# EAGLE board LUZES_18Fv3 (EAGLE 5.04)
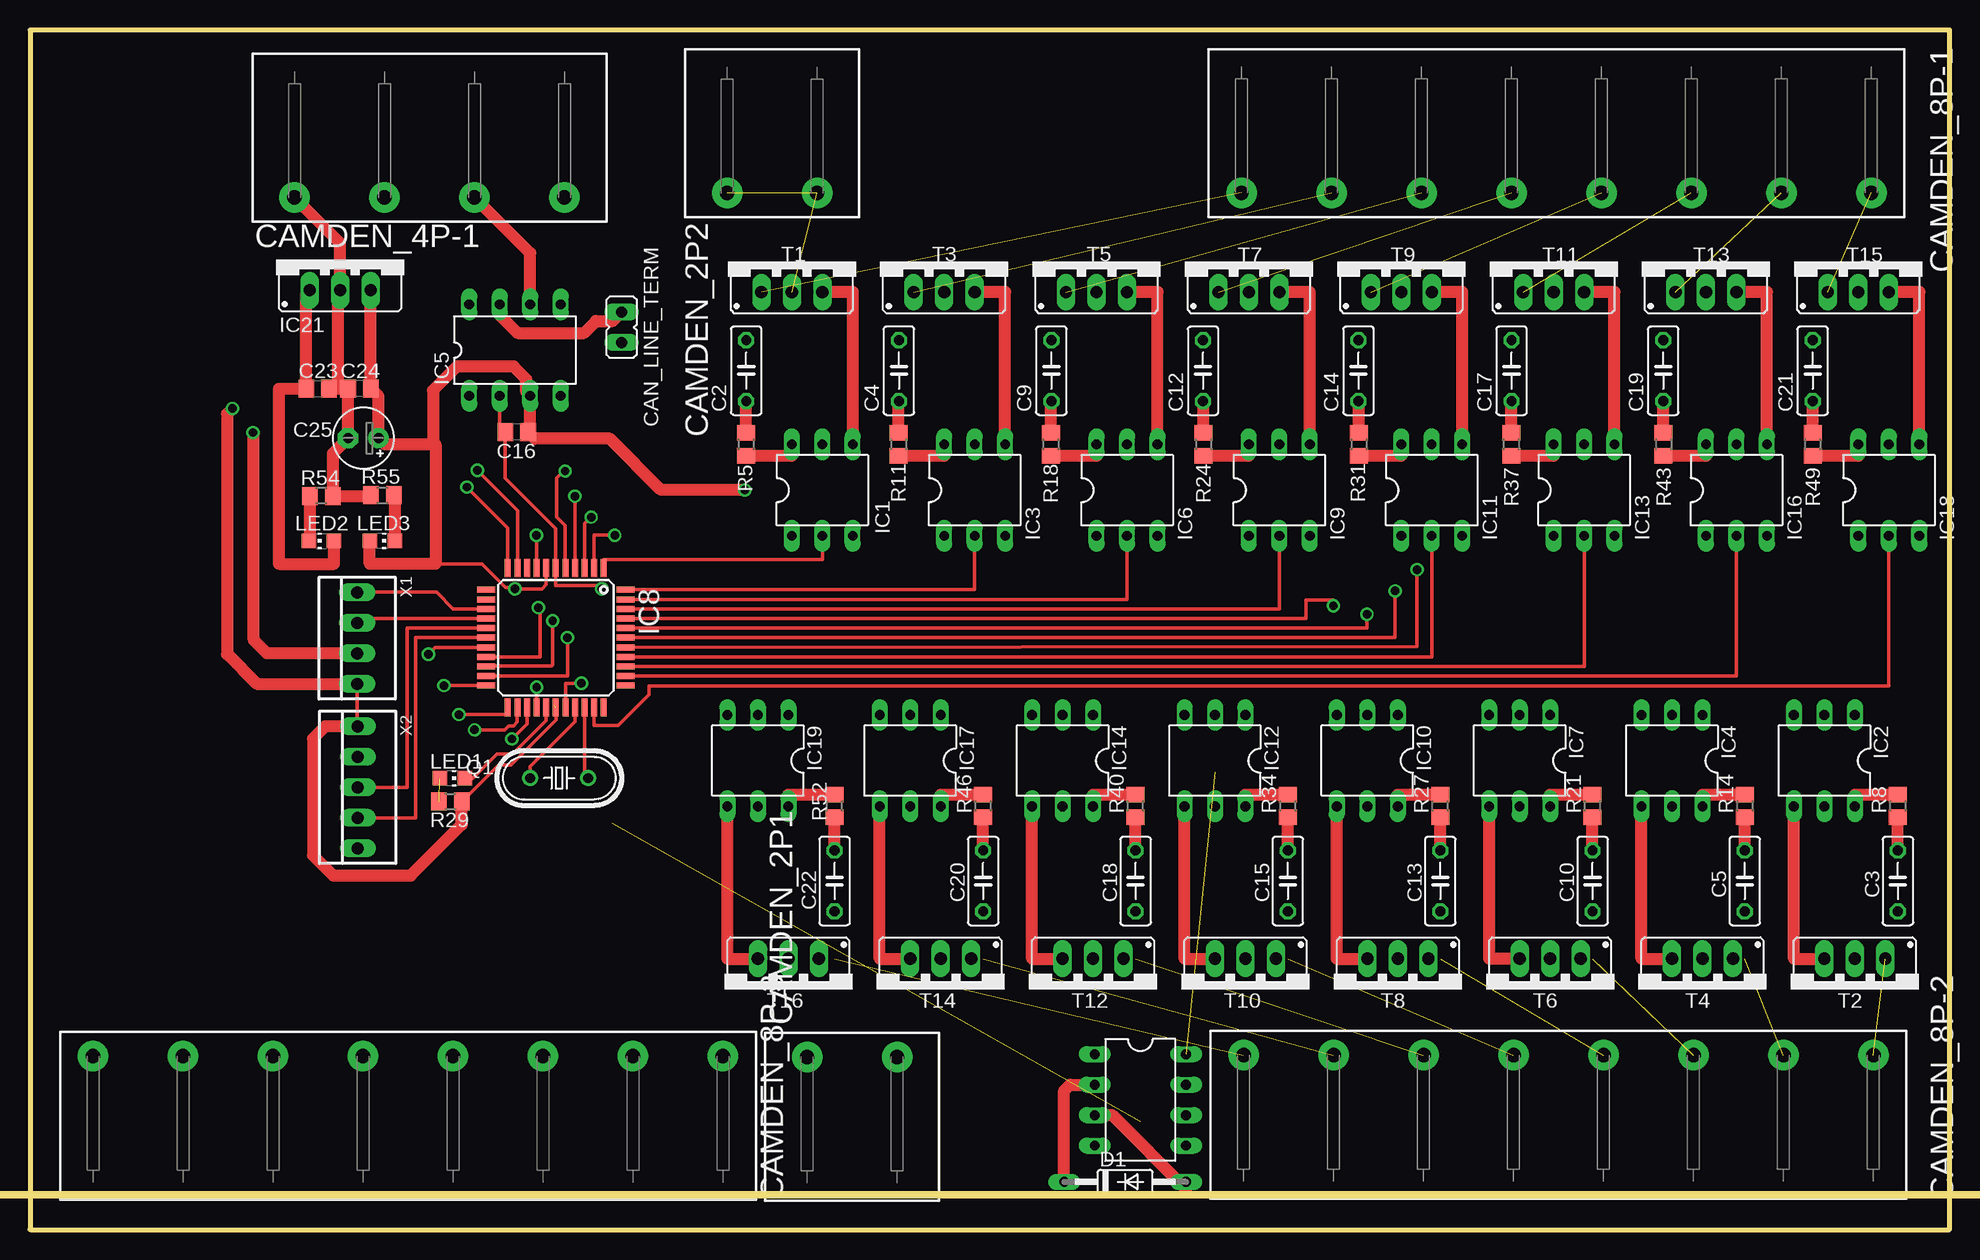
[diagram p0: board, top side]
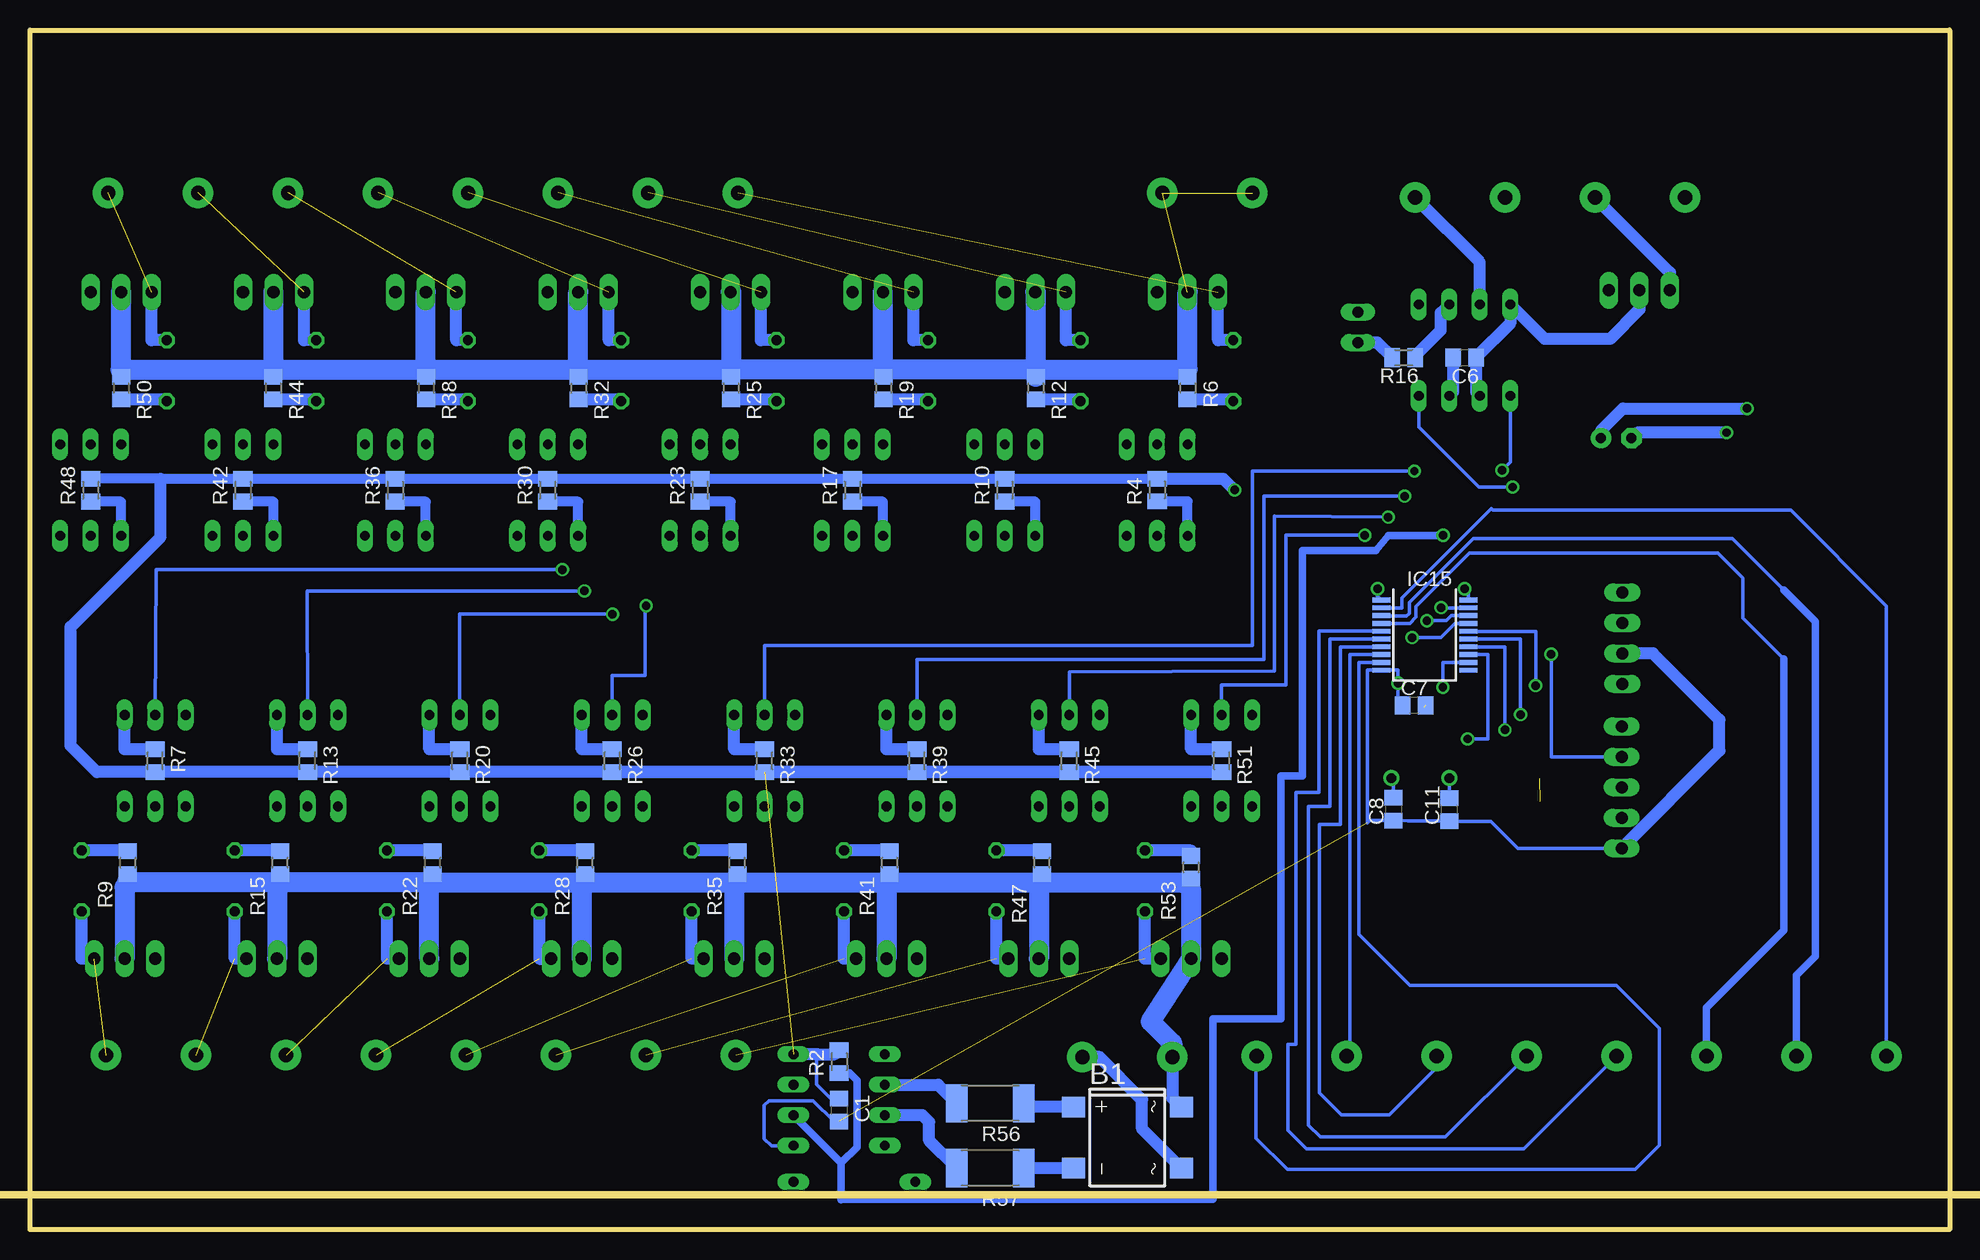
[diagram p1: board, bottom side, seen from below]

Size 160 x 100 mm. Coordinates in mm from the lower left corner, seen from the top.
Outline: 0,100 0,0 160,0 160,100 0,100
Copper layers (1*16): Top 0.035mm / dielectric 1.5mm / Bottom 0.035mm
Design rules "10mils": minimum track width 10mil, minimum drill 24mil, track to track 10mil, track to pad 10mil, pad to pad 10mil, via to via 10mil, smd to smd 10mil, copper to edge 40mil, drill to drill 10mil, minimum pad ring 10mil, minimum via ring 8mil, stop-mask expansion 0mil, vias tented up to drill 0mil, thermal gap 10mil
Milling: 2 lines

## Footprints (pad centres in the part's own frame; a part is rotated, then mirrored left to right if it is on the bottom)
DIL08 = drill 0.813 long: 1 -3.81,-3.81; 2 -1.27,-3.81; 3 1.27,-3.81; 4 3.81,-3.81; 5 3.81,3.81; 6 1.27,3.81; 7 -1.27,3.81; 8 -3.81,3.81
DBS = smd 1.7 x 1.9: + -2.55,-4.5; - 2.55,-4.5; AC1 -2.55,4.5; AC2 2.55,4.5
C0805 = smd 1.3 x 1.5: 1 -0.95,0; 2 0.95,0
C050-025X075 = drill 0.813 octagon: 1 -2.54,0; 2 2.54,0
E2,5-5 = drill 0.813 pad 1.7 round: + -1.27,0 | drill 0.813 pad 1.7 octagon: - 1.27,0
CTB9550-2 = drill 1.2 pad 2.54 round: P$1 0,0; P$2 7.5,0
CTB9550-4 = drill 1.2 pad 2.54 round: P$1 0,0; P$2 7.5,0; P$3 15,0; P$4 22.5,0
CTB9550-8 = drill 1.2 pad 2.54 round: P$9 0,0; P$10 7.5,0; P$11 15,0; P$12 22.5,0; P$13 30,0; P$14 37.5,0; P$15 45,0; P$16 52.5,0
JP1 = drill 0.914 long: 1 0,-1.27; 2 0,1.27
DO35-10 = drill 0.813 long: A 5.08,0; C -5.08,0
DIL06 = drill 0.813 long: 1 -2.54,-3.81; 2 0,-3.81; 3 2.54,-3.81; 4 2.54,3.81; 5 0,3.81; 6 -2.54,3.81
TQFP44 = smd 1.5 x 0.5: 1 -5.8,4; 2 -5.8,3.2; 3 -5.8,2.4; 4 -5.8,1.6; 5 -5.8,0.8; 6 -5.8,0; 7 -5.8,-0.8; 8 -5.8,-1.6; 9 -5.8,-2.4; 10 -5.8,-3.2; 11 -5.8,-4; 23 5.8,-4; 24 5.8,-3.2; 25 5.8,-2.4; 26 5.8,-1.6; 27 5.8,-0.8; 28 5.8,0; 29 5.8,0.8; 30 5.8,1.6; 31 5.8,2.4; 32 5.8,3.2; 33 5.8,4 | smd 0.5 x 1.5: 12 -4,-5.8; 13 -3.2,-5.8; 14 -2.4,-5.8; 15 -1.6,-5.8; 16 -0.8,-5.8; 17 0,-5.8; 18 0.8,-5.8; 19 1.6,-5.8; 20 2.4,-5.8; 21 3.2,-5.8; 22 4,-5.8; 34 4,5.8; 35 3.2,5.8; 36 2.4,5.8; 37 1.6,5.8; 38 0.8,5.8; 39 0,5.8; 40 -0.8,5.8; 41 -1.6,5.8; 42 -2.4,5.8; 43 -3.2,5.8; 44 -4,5.8
SSOP20@1 = smd 0.4 x 1.5: 1 -2.925,-3.625; 2 -2.275,-3.625; 3 -1.625,-3.625; 4 -0.975,-3.625; 5 -0.325,-3.625; 6 0.325,-3.625; 7 0.975,-3.625; 8 1.625,-3.625; 9 2.275,-3.625; 10 2.925,-3.625; 11 2.925,3.625; 12 2.275,3.625; 13 1.625,3.625; 14 0.975,3.625; 15 0.325,3.625; 16 -0.325,3.625; 17 -0.975,3.625; 18 -1.625,3.625; 19 -2.275,3.625; 20 -2.925,3.625
78XXS = drill 1.016 long: GND 0,-2.54; IN -2.54,-2.54; OUT 2.54,-2.54
CHIP-LED0805 = smd 1.2 x 1.2: A 0,-1.05; C 0,1.05
HC49U-V = drill 0.813 round: 1 -2.413,0; 2 2.413,0
M0805 = smd 1.3 x 1.6: 1 -0.95,0; 2 0.95,0
R0805 = smd 1.3 x 1.5: 1 -0.95,0; 2 0.95,0
R2512 = smd 1.8 x 3.2: 1 -2.8,0; 2 2.8,0
TO220DS = drill 1.016 long: A1 -2.54,-2.54; A2 0,-2.54; G 2.54,-2.54
22-23-2041 = drill 1 long: 1 -3.81,0; 2 -1.27,0; 3 1.27,0; 4 3.81,0
22-23-2051 = drill 1 long: 1 -5.08,0; 2 -2.54,0; 3 0,0; 4 2.54,0; 5 5.08,0

## Placement (x,y rotation side)
1  6N138  [DIL08]  92.55,10.8 270 top
B1  DBS107G  [DBS]  68.53,7.67 270 bottom
C1  100n  [C0805]  92.55,9.96 270 bottom
C2  0.05u  [C050-025X075]  59.7,71.6 90 top
C3  0.05u  [C050-025X075]  155.69,29.06 270 top
C4  0.05u  [C050-025X075]  72.43,71.6 90 top
C5  0.05u  [C050-025X075]  142.93,29.06 270 top
C6  100n  [C0805]  40.42,72.68 0 bottom
C7  100n  [C0805]  44.63,43.68 180 bottom
C8  22pF  [C0805]  46.36,35.04 270 bottom
C9  0.05u  [C050-025X075]  85.14,71.6 90 top
C10  0.05u  [C050-025X075]  130.25,29.06 270 top
C11  22pF  [C0805]  41.7,35 90 bottom
C12  0.05u  [C050-025X075]  97.78,71.6 90 top
C13  0.05u  [C050-025X075]  117.55,29.06 270 top
C14  0.05u  [C050-025X075]  110.73,71.6 90 top
C15  0.05u  [C050-025X075]  104.85,29.06 270 top
C16  100n  [C0805]  40.57,66.47 180 top
C17  0.05u  [C050-025X075]  123.5,71.6 90 top
C18  0.05u  [C050-025X075]  92.16,29.06 270 top
C19  0.05u  [C050-025X075]  136.14,71.6 90 top
C20  0.05u  [C050-025X075]  79.45,29.06 270 top
C21  0.05u  [C050-025X075]  148.6,71.6 90 top
C22  0.05u  [C050-025X075]  67.06,29.06 270 top
C23  100n  [C0805]  23.98,70.1 0 top
C24  100n  [C0805]  27.47,70.1 180 top
C25  47u  [E2,5-5]  27.79,65.98 180 top
CAMDEN_2P1  [CTB9550-2]  72.27,14.38 180 top
CAMDEN_2P2  [CTB9550-2]  58.11,86.41 0 top
CAMDEN_4P-1  [CTB9550-4]  22.06,86.03 0 top
CAMDEN_8P-1  [CTB9550-8]  100.98,86.42 0 top
CAMDEN_8P-2  [CTB9550-8]  153.66,14.54 180 top
CAMDEN_8P-3  [CTB9550-8]  57.76,14.45 180 top
CAN_LINE_TERM  [JP1]  49.31,75.22 180 top
D1  1N4148  [DO35-10]  91.28,3.97 0 top
IC1  MOC3022  [DIL06]  66.04,61.64 0 top
IC2  MOC3022  [DIL06]  149.57,39.09 180 top
IC3  MOC3022  [DIL06]  78.74,61.64 0 top
IC4  MOC3022  [DIL06]  136.87,39.09 180 top
IC5  MCP2551  [DIL08]  40.42,73.31 0 top
IC6  MOC3022  [DIL06]  91.44,61.64 0 top
IC7  MOC3022  [DIL06]  124.17,39.09 180 top
IC8  PIC18F4682  [TQFP44]  43.83,49.34 270 top
IC9  MOC3022  [DIL06]  104.14,61.64 0 top
IC10  MOC3022  [DIL06]  111.47,39.09 180 top
IC11  MOC3022  [DIL06]  116.84,61.64 0 top
IC12  MOC3022  [DIL06]  98.77,39.09 180 top
IC13  MOC3022  [DIL06]  129.54,61.64 0 top
IC14  MOC3022  [DIL06]  86.07,39.09 180 top
IC15  MAX6818  [SSOP20@1]  43.73,49.55 270 bottom
IC16  MOC3022  [DIL06]  142.24,61.64 0 top
IC17  MOC3022  [DIL06]  73.37,39.09 180 top
IC18  MOC3022  [DIL06]  154.94,61.64 0 top
IC19  MOC3022  [DIL06]  60.67,39.09 180 top
IC21  [78XXS]  25.85,80.84 0 top
LED1  [CHIP-LED0805]  35.2,37.61 270 top
LED2  [CHIP-LED0805]  24.29,57.4 90 top
LED3  [CHIP-LED0805]  29.37,57.4 270 top
Q1  10MHz  [HC49U-V]  44.11,37.63 0 top
R2  2K21  [M0805]  92.55,14.01 90 bottom
R4  330  [M0805]  66.04,61.65 90 bottom
R5  360  [R0805]  59.69,65.45 270 top
R6  470  [R0805]  63.5,70.15 270 bottom
R7  330  [M0805]  149.57,39.09 270 bottom
R8  360  [R0805]  155.7,35.31 90 top
R9  470  [R0805]  151.84,30.58 90 bottom
R10  330  [M0805]  78.75,61.64 90 bottom
R11  360  [R0805]  72.39,65.45 270 top
R12  470  [R0805]  76.16,70.15 270 bottom
R13  330  [M0805]  136.87,39.08 270 bottom
R14  360  [R0805]  142.95,35.31 90 top
R15  470  [R0805]  139.14,30.58 90 bottom
R16  120  [M0805]  45.5,72.68 180 bottom
R17  330  [M0805]  91.44,61.64 90 bottom
R18  360  [R0805]  85.09,65.45 270 top
R19  470  [R0805]  88.86,70.15 270 bottom
R20  330  [M0805]  124.17,39.08 270 bottom
R21  360  [R0805]  130.25,35.31 90 top
R22  470  [R0805]  126.44,30.58 90 bottom
R23  330  [M0805]  104.14,61.64 90 bottom
R24  360  [R0805]  97.82,65.45 270 top
R25  470  [R0805]  101.56,70.15 270 bottom
R26  330  [M0805]  111.47,39.08 270 bottom
R27  360  [R0805]  117.55,35.31 90 top
R28  470  [R0805]  113.74,30.58 90 bottom
R29  560  [R0805]  35.04,35.69 0 top
R30  330  [M0805]  116.85,61.64 90 bottom
R31  360  [R0805]  110.77,65.45 270 top
R32  470  [R0805]  114.28,70.15 270 bottom
R33  330  [M0805]  98.77,39.08 270 bottom
R34  360  [R0805]  104.85,35.31 90 top
R35  470  [R0805]  101.04,30.58 90 bottom
R36  330  [M0805]  129.55,61.64 90 bottom
R37  360  [R0805]  123.47,65.45 270 top
R38  470  [R0805]  126.98,70.15 270 bottom
R39  330  [M0805]  86.07,39.08 270 bottom
R40  360  [R0805]  92.15,35.31 90 top
R41  470  [R0805]  88.34,30.58 90 bottom
R42  330  [M0805]  142.26,61.64 90 bottom
R43  360  [R0805]  136.17,65.45 270 top
R44  470  [R0805]  139.71,70.15 270 bottom
R45  330  [M0805]  73.38,39.08 270 bottom
R46  360  [R0805]  79.45,35.31 90 top
R47  470  [R0805]  75.64,30.58 90 bottom
R48  330  [M0805]  154.94,61.64 90 bottom
R49  360  [R0805]  148.59,65.45 270 top
R50  470  [R0805]  152.4,70.15 270 bottom
R51  330  [M0805]  60.67,39.09 270 bottom
R52  360  [R0805]  67.06,35.31 90 top
R53  470  [R0805]  63.21,30.2 90 bottom
R54  560  [R0805]  24.29,61.16 180 top
R55  560  [R0805]  29.37,61.21 0 top
R56  20K  [R2512]  79.96,10.52 180 bottom
R57  20K  [R2512]  79.96,5.13 180 bottom
T1  BTA216  [TO220DS]  63.5,80.69 0 top
T2  BTA216  [TO220DS]  152.11,20.04 180 top
T3  BTA216  [TO220DS]  76.2,80.69 0 top
T4  BTA216  [TO220DS]  139.41,20.04 180 top
T5  BTA216  [TO220DS]  88.9,80.69 0 top
T6  BTA216  [TO220DS]  126.71,20.04 180 top
T7  BTA216  [TO220DS]  101.6,80.69 0 top
T8  BTA216  [TO220DS]  114.01,20.04 180 top
T9  BTA216  [TO220DS]  114.3,80.69 0 top
T10  BTA216  [TO220DS]  101.31,20.04 180 top
T11  BTA216  [TO220DS]  127,80.69 0 top
T12  BTA216  [TO220DS]  88.61,20.04 180 top
T13  BTA216  [TO220DS]  139.7,80.69 0 top
T14  BTA216  [TO220DS]  75.91,20.04 180 top
T15  BTA216  [TO220DS]  152.4,80.69 0 top
T16  BTA216  [TO220DS]  63.21,20.04 180 top
X1  22-23-2041  [22-23-2041]  27.27,49.3 90 top
X2  22-23-2051  [22-23-2051]  27.32,36.86 90 top

## Library data of the parts
1 = optocoupler
B1 = rectifier
C1-C25 R2 R4-R57 = rcl
CAMDEN_2P1 CAMDEN_2P2 CAMDEN_4P-1 CAMDEN_8P-1-CAMDEN_8P-3 = mycomponents
CAN_LINE_TERM = jumper
D1 = diode
IC1-IC4 IC6 IC7 IC9-IC14 IC16-IC19 = ic-package
IC5 = micro-philips
IC8 = microchip
IC15 = maxim
IC21 = v-reg
LED1-LED3 = led
Q1 = crystal
T1-T16 = triac
X1 X2 = con-molex

## Nets
+5V: 1.8 C1.1 C6.1 C7.1 C16.1 C24.1 C25.+ IC5.3 IC8.7 IC8.28 IC15.20 IC21.OUT LED3.A R2.2 R4.2 R7.2 R10.2 R13.2 R17.2 R20.2 R23.2 R26.2 R29.2 R30.2 R33.2 R36.2 R39.2 R42.2 R45.2 R48.2 R51.2 X1.1 X2.5
+18V: 1.6 IC8.8 R2.1
CAN_H: CAMDEN_4P-1.P$4 CAN_LINE_TERM.1 IC5.7
CAN_L: CAMDEN_4P-1.P$3 IC5.6 R16.1
CAN_RX(TTL): IC5.4 IC8.11
CAN_TX(TTL): IC5.1 IC8.10
GND: 1.5 C1.2 C6.2 C7.2 C8.2 C11.1 C16.2 C23.2 C24.2 C25.- CAMDEN_4P-1.P$1 IC5.2 IC5.8 IC8.6 IC8.29 IC15.1 IC15.10 IC21.GND R54.1 R55.1 X1.2 X2.1
INPUT1: IC8.19 IC15.19
INPUT2: IC8.20 IC15.18
INPUT3: IC8.21 IC15.17
INPUT4: IC8.22 IC15.16
INPUT5: IC8.23 IC15.15
INPUT6: IC8.24 IC15.14
INPUT7: IC8.25 IC15.13
INPUT8: IC8.26 IC15.12
MCLR: IC8.18 X2.4
N$1: C8.1 IC8.31 Q1.2
N$2: C11.2 IC8.30 Q1.1
N$3: B1.AC1 CAMDEN_2P1.P$2 R9.1 R15.1 R22.1 R28.1 R35.1 R41.1 R47.1 R53.1 T2.A2 T4.A2 T6.A2 T8.A2 T10.A2 T12.A2 T14.A2 T16.A2
N$4: B1.AC2 CAMDEN_2P1.P$1
N$5: B1.+ R56.1
N$6: CAMDEN_8P-3.P$16 IC15.2
N$7: CAMDEN_8P-3.P$15 IC15.3
N$8: CAMDEN_8P-3.P$9 IC15.9
N$9: CAMDEN_8P-3.P$10 IC15.8
N$10: CAMDEN_8P-3.P$11 IC15.7
N$11: CAMDEN_8P-3.P$14 IC15.4
N$12: CAMDEN_8P-3.P$13 IC15.5
N$13: CAMDEN_8P-3.P$12 IC15.6
N$16: IC3.6 R11.2
N$17: IC6.6 R18.2
N$18: IC9.6 R24.2
N$20: IC2.6 R8.2
N$25: IC4.6 R14.2
N$27: IC11.6 R31.2
N$29: IC13.6 R37.2
N$30: IC16.6 R43.2
N$33: IC17.6 R46.2
N$34: IC14.6 R40.2
N$35: IC12.6 R34.2
N$36: IC10.6 R27.2
N$37: IC7.6 R21.2
N$38: LED1.A R29.1
N$39: IC8.27 LED1.C
N$40: IC18.6 R49.2
N$41: IC19.6 R52.2
N$46: CAMDEN_2P2.P$1 CAMDEN_2P2.P$2 R6.1 R12.1 R19.1 R25.1 R32.1 R38.1 R44.1 R50.1 T1.A2 T3.A2 T5.A2 T7.A2 T9.A2 T11.A2 T13.A2 T15.A2
N$111: C23.1 CAMDEN_4P-1.P$2 IC21.IN LED2.A
N$112: LED2.C R54.2
N$115: LED3.C R55.2
N$116: 1.2 D1.C R56.2
N$117: B1.- R57.1
N$118: 1.3 D1.A R57.2
N$119: IC1.1 R4.1
N$120: IC1.6 R5.2
N$121: C2.1 R5.1 R6.2
N$123: IC1.4 T1.G
N$125: IC3.1 R10.1
N$127: C4.1 R11.1 R12.2
N$129: IC3.4 T3.G
N$131: IC6.1 R17.1
N$133: C9.1 R18.1 R19.2
N$135: IC6.4 T5.G
N$137: IC9.1 R23.1
N$139: C12.1 R24.1 R25.2
N$141: IC9.4 T7.G
N$143: IC11.1 R30.1
N$145: C14.1 R31.1 R32.2
N$147: IC11.4 T9.G
N$149: IC13.1 R36.1
N$151: C17.1 R37.1 R38.2
N$153: IC13.4 T11.G
N$155: IC16.1 R42.1
N$157: C19.1 R43.1 R44.2
N$159: IC16.4 T13.G
N$161: IC18.1 R48.1
N$163: C21.1 R49.1 R50.2
N$165: IC18.4 T15.G
N$168: IC2.1 R7.1
N$170: C3.1 R8.1 R9.2
N$172: IC2.4 T2.G
N$174: IC4.1 R13.1
N$176: C5.1 R14.1 R15.2
N$178: IC4.4 T4.G
N$180: IC7.1 R20.1
N$182: C10.1 R21.1 R22.2
N$184: IC7.4 T6.G
N$186: IC10.1 R26.1
N$188: C13.1 R27.1 R28.2
N$190: IC10.4 T8.G
N$192: IC12.1 R33.1
N$194: C15.1 R34.1 R35.2
N$196: IC12.4 T10.G
N$198: IC14.1 R39.1
N$200: C18.1 R40.1 R41.2
N$202: IC14.4 T12.G
N$204: IC17.1 R45.1
N$206: C20.1 R46.1 R47.2
N$208: IC17.4 T14.G
N$210: IC19.1 R51.1
N$212: C22.1 R52.1 R53.2
N$214: IC19.4 T16.G
N$217: CAN_LINE_TERM.2 R16.2
OUT1: IC8.32 IC18.2
OUT2: IC8.35 IC16.2
OUT3: IC8.36 IC13.2
OUT4: IC8.37 IC11.2
OUT5: IC8.42 IC9.2
OUT6: IC6.2 IC8.43
OUT7: IC3.2 IC8.44
OUT8: IC1.2 IC8.1
OUT9: IC2.2 IC8.38
OUT10: IC4.2 IC8.39
OUT11: IC7.2 IC8.40
OUT12: IC8.41 IC10.2
OUT13: IC8.5 IC12.2
OUT14: IC8.4 IC14.2
OUT15: IC8.3 IC17.2
OUT16: IC8.2 IC19.2
OUTPUT1: C22.2 CAMDEN_8P-2.P$16 T16.A1
OUTPUT2: C20.2 CAMDEN_8P-2.P$15 T14.A1
OUTPUT3: C18.2 CAMDEN_8P-2.P$14 T12.A1
OUTPUT4: C15.2 CAMDEN_8P-2.P$13 T10.A1
OUTPUT5: C13.2 CAMDEN_8P-2.P$12 T8.A1
OUTPUT6: C10.2 CAMDEN_8P-2.P$11 T6.A1
OUTPUT7: C5.2 CAMDEN_8P-2.P$10 T4.A1
OUTPUT8: C3.2 CAMDEN_8P-2.P$9 T2.A1
OUTPUT9: C2.2 CAMDEN_8P-1.P$9 T1.A1
OUTPUT10: C4.2 CAMDEN_8P-1.P$10 T3.A1
OUTPUT11: C9.2 CAMDEN_8P-1.P$11 T5.A1
OUTPUT12: C12.2 CAMDEN_8P-1.P$12 T7.A1
OUTPUT13: C14.2 CAMDEN_8P-1.P$13 T9.A1
OUTPUT14: C17.2 CAMDEN_8P-1.P$14 T11.A1
OUTPUT15: C19.2 CAMDEN_8P-1.P$15 T13.A1
OUTPUT16: C21.2 CAMDEN_8P-1.P$16 T15.A1
PGC: IC8.16 X2.3
PGD: IC8.17 X2.2
RS232_RX: IC8.14 X1.4
RS232_TX: IC8.15 X1.3

## Tracks (layer width: path | path; a pad name or v marks a point on that pad's centre or on a via)
+5V  (via drill 0.7)  (2 unrouted)
  Top 0.305: R29.2 36,35.69 39.05,38.73 40.09,38.73 43.85,42.49 43.85,43.52 IC8.28 | X1.1 27.27,41.99 X2.5 | C16.1 41.69,66.65 | IC8.7 43.03,53.77 42.67,53.41 v40.42,53.41 40.33,53.51 39.66,53.51 37.68,55.49 33.8,55.49
  Top 1.016: IC21.OUT 28.39,70.13 C24.1 29.06,69.47 C25.+ 29.59,65.44 33.6,65.44 | LED3.A 28.32,55.49 33.8,55.49 33.8,65.44 33.6,65.44 | 41.69,66.65 IC5.3 41.37,69.82 41.37,70.89 40.32,71.94 35.58,71.94 33.6,69.96 33.6,65.44 | C16.1 42.07,65.92 48.34,65.92 52.61,61.65 v59.59,61.65 | X1.1 18.9,45.49 16.43,47.97 16.43,68 v16.87,68.44 | X2.5 24.61,41.94 23.6,40.93 23.6,31.2 25.28,29.52 31.74,29.52 35.99,33.77 R29.2
  Bottom 0.305: C1.1 93.22,10.91 94.43,12.12 94.43,14.55 94.37,14.61 | IC15.20 40.11,52.98 v40.42,53.41
  Bottom 0.813: R4.2 78.75,62.6 R10.2 R17.2 R23.2 R30.2 R36.2 R42.2 149.12,62.59 R48.2
  Bottom 1.016: R20.2 R26.2 R33.2 R39.2 R45.2 R51.2 154.42,38.14 156.61,40.33 156.61,50.24 149.12,57.73 149.12,62.59 | R20.2 | R20.2 R13.2 | R13.2 | R13.2 R7.2 | C6.1 41.37,69.82 IC5.3 | v16.87,68.44 27.21,68.44 29.06,66.6 C25.+ | R2.2 92.9,14.61 94.37,14.61 1.8 | v59.59,61.65 60.54,62.6 R4.2
+18V  (via drill 0.7)
  Top 0.305: IC8.8 42.23,57.85 v42.21,57.87
  Bottom 0.61: v42.21,57.87 46.78,57.87 47.83,56.62 53.92,56.62 53.92,37.82 55.72,37.82 55.72,17.57 61.38,17.57 61.38,2.54 92.38,2.49 92.38,5.55 | 92.38,5.55 1.6 | R2.1 91.69,13.06 91.07,12.43 91.07,6.86 92.38,5.55
CAN_H
  Top 1.016: CAN_LINE_TERM.1 48.57,75.74 47.18,75.74 46.17,74.73 40.63,74.73 39.15,76.21 IC5.7
  Bottom 1.016: IC5.7 39.15,80.63 CAMDEN_4P-1.P$4
CAN_L
  Top 1.016: CAMDEN_4P-1.P$3 41.69,81.4 IC5.6
  Bottom 1.016: IC5.6 42.41,76.41 42.41,74.97 44.55,72.83 R16.1
CAN_RX(TTL)  (via drill 0.7)
  Top 0.305: IC8.11 39.83,58.48 v36.42,61.89
  Bottom 0.305: v36.42,61.89 39.22,61.89 44.22,66.89 44.22,69.49 IC5.4
CAN_TX(TTL)  (via drill 0.7)
  Top 0.305: v37.29,63.3 40.63,59.96 IC8.10
  Bottom 0.305: IC5.1 36.61,63.97 v37.29,63.3
GND  (via drill 0.7)  (1 unrouted)
  Top 0.305: v47.67,53.42 47.28,53.7 43.84,53.7 43.83,53.71 IC8.6 43.83,58.43 39.62,62.65 C16.2 39.15,66.94 IC5.2 | v45.97,45.53 44.63,45.53 IC8.29
  Top 1.016: CAMDEN_4P-1.P$1 25.85,82.24 IC21.GND 25.68,78.14 25.68,70.08 | 25.68,70.08 25.66,70.1 C23.2 | 26.5,70.08 C24.2 | 26.5,70.08 25.68,70.08 | 26.5,70.08 26.52,70.06 C25.- 25.24,64.7 R54.1 28.42,61.16 R55.1 | X1.2 19.76,48.03 18.65,49.14 18.65,66.38 v18.59,66.44
  Bottom 0.305: IC15.1 47.67,52.79 v47.67,53.42 | 48.51,33.9 48.51,46.63 IC15.10 45.97,46.63 v45.97,45.53 45.97,44.07 C7.2 | 48.51,33.9 48.33,34.08 C8.2 45.15,34.05 C11.1 41.67,34.02 38.22,34.02 35.99,31.78 X2.1 | C1.2 93,9.01 94.73,10.75 98.4,10.75 98.8,10.34 98.8,7.58 98.2,6.97 96.38,6.97 1.5 | 48.51,33.9 48.51,46.31
  Bottom 1.016: IC21.GND 25.85,76.71 28.31,74.25 33.74,74.25 IC5.8 36.61,75.54 C6.2 39.47,69.82 IC5.2 | v18.59,66.44 26.06,66.44 C25.- | X1.2 24.72,48.03 19.17,42.48 19.17,39.93 X2.1
INPUT1  (via drill 0.7)
  Top 0.305: v42.37,51.85 42.51,51.85 42.51,47.71 38.03,47.71 IC8.19
  Bottom 0.305: IC15.19 42.37,51.83 v42.37,51.85
INPUT2  (via drill 0.7)
  Top 0.305: v43.56,50.75 43.56,47.08 43.47,46.99 38.08,46.99 IC8.20
  Bottom 0.305: IC15.18 41.52,51.18 41.92,50.77 43.54,50.77 v43.56,50.75
INPUT3  (via drill 0.7)
  Top 0.305: v44.8,49.35 44.8,46.14 IC8.21
  Bottom 0.305: IC15.17 41.21,50.53 42.39,49.35 v44.8,49.35
INPUT4  (via drill 0.7)
  Top 0.305: v34.49,45.35 v34.49,45.34 IC8.22
  Bottom 0.305: IC15.16 40.11,49.86 34.49,49.86 v34.49,45.35
INPUT5  (via drill 0.7)
  Top 0.305: v35.75,42.93 39.83,42.93 IC8.23
  Bottom 0.305: IC15.15 35.75,49.23 v35.75,42.93
INPUT6  (via drill 0.7)
  Top 0.305: v37.06,41.65 39.55,41.65 39.89,41.99 40.31,41.99 40.62,42.3 IC8.24
  Bottom 0.305: IC15.14 37.06,48.58 v37.06,41.65
INPUT7  (via drill 0.7)
  Top 0.305: IC8.25 41.43,42.15 v40.17,40.89
  Bottom 0.305: v40.17,40.89 38.49,40.89 38.49,47.94 IC15.13
INPUT8  (via drill 0.7)
  Top 0.305: IC8.26 42.23,45.4 v42.23,45.21
  Bottom 0.305: v42.23,45.21 42.23,47.28 IC15.12
MCLR  (via drill 0.7)
  Top 0.305: v33.2,47.97 33.77,48.54 IC8.18
  Bottom 0.305: X2.4 33.2,39.4 v33.2,47.97
N$1
  Top 0.305: IC8.31 46.23,37.92 Q1.2
  Bottom 0.305: C8.1 46.36,37.47 Q1.2
N$2
  Top 0.305: IC8.30 45.44,43.53 45.44,42.35 41.69,38.6 Q1.1
  Bottom 0.305: C11.2 Q1.1
N$3
  Bottom 0.305: R15.1 139.14,29.07 139.26,28.94 | R9.1 151.84,29.02 151.92,28.94 | R22.1 126.44,29.01 126.37,28.94 | R28.1 113.72,29.63 113.03,28.94 | R35.1 101.04,29.05 101.15,28.94 | R41.1 88.34,29.03 88.25,28.94 | R47.1 75.64,29.03 75.55,28.94 | R53.1 63.21,29.06 63.33,28.94
  Bottom 1.016: CAMDEN_2P1.P$2 64.77,10.96 B1.AC1
  Bottom 1.676: 126.22,28.94 126.37,28.94 139.02,28.94 | 139.02,28.94 139.26,28.94 151.92,28.94 151.92,28.75 152.11,28.56 T2.A2 | 126.22,28.94 113.42,28.94 | 113.42,28.94 113.03,28.94 101.15,28.94 101.05,28.94 | 101.05,28.94 88.49,28.94 | 88.49,28.94 88.25,28.94 75.89,28.94 | 75.89,28.94 75.55,28.94 63.33,28.94 63.33,28.46 63.23,28.46 63.23,22.58 T16.A2 63.29,22.5 66.6,17.35 64.77,15.52 CAMDEN_2P1.P$2 | T14.A2 75.91,28.92 75.89,28.94 | T12.A2 88.61,28.83 88.49,28.94 | T10.A2 101.31,28.69 101.05,28.94 | T8.A2 114.01,28.35 113.42,28.94 | T6.A2 126.71,28.45 126.22,28.94 | T4.A2 139.41,28.55 139.02,28.94
N$4
  Bottom 1.016: CAMDEN_2P1.P$1 70.85,14.38 67.29,10.82 67.29,8.38 B1.AC2
N$5
  Bottom 1.016: B1.+ 76.85,10.22 R56.1
N$6
  Bottom 0.305: IC15.2 45.65,51.83 45.65,52.64 38.19,60.11 38.04,59.96 13.24,59.96 5.26,51.99 CAMDEN_8P-3.P$16
N$7
  Bottom 0.305: IC15.3 47.32,51.14 45.25,51.14 45.03,51.36 45.03,52.29 39.71,57.61 18.11,57.61 13.81,53.31
  Bottom 0.61: 13.81,53.31 11.21,50.71 11.21,22.76 12.76,21.21 CAMDEN_8P-3.P$15
N$8
  Bottom 0.305: IC15.9 49.24,47.28 49.24,24.62 44.97,20.34 27.76,20.34 24.18,16.76 24.18,7 26.17,5.01 55.21,5.01 57.8,7.6 57.8,14.42 CAMDEN_8P-3.P$9
N$9
  Bottom 0.305: IC15.8 49.97,47.93 49.97,14.75 CAMDEN_8P-3.P$10
N$10
  Bottom 0.305: IC15.7 50.78,48.58 50.78,33.77 52.5,33.77 52.5,11.39 50.68,9.57 46.68,9.57 42.76,13.49 CAMDEN_8P-3.P$11
N$11
  Bottom 0.305: IC15.4 45,50.52 44.47,51.05 44.47,51.95 40.03,56.39 19.32,56.39 17.24,54.3 17.24,50.99 13.81,47.56
  Bottom 0.61: 13.81,47.56 13.82,47.56 13.82,24.94 20.26,18.49 CAMDEN_8P-3.P$14
N$12
  Bottom 0.305: IC15.5 52.58,49.88 52.58,36.43 54.46,36.43 54.46,15.43 55.13,15.43 55.13,8.26 53.62,6.74 35.47,6.74 CAMDEN_8P-3.P$13
N$13
  Bottom 0.305: IC15.6 51.64,49.23 51.64,35.28 53.42,35.28 53.42,8.68 52.45,7.71 42,7.71 CAMDEN_8P-3.P$12
N$16
  Top 1.016: R11.2 76.2,64.5 IC3.6
N$17
  Top 1.016: R18.2 88.9,64.5 IC6.6
N$18
  Top 1.016: R24.2 101.6,64.5 IC9.6
N$20
  Top 1.016: IC2.6 152.11,36.26 R8.2
N$25
  Top 1.016: IC4.6 139.41,36.26 R14.2
N$27
  Top 1.016: R31.2 114.3,64.5 IC11.6
N$29
  Top 1.016: R37.2 127,64.5 IC13.6
N$30
  Top 1.016: R43.2 139.7,64.5 IC16.6
N$33
  Top 1.016: IC17.6 75.91,36.26 R46.2
N$34
  Top 1.016: IC14.6 88.61,36.26 R40.2
N$35
  Top 1.016: IC12.6 101.31,36.26 R34.2
N$36
  Top 1.016: IC10.6 114.01,36.26 R27.2
N$37
  Top 1.016: IC7.6 126.71,36.26 R21.2
N$38  (1 unrouted)
N$39
  Top 0.305: LED1.C 36.89,37.61 38.94,39.66 40.23,39.66 43.01,42.44 43.01,43.51 IC8.27
N$40
  Top 1.016: R49.2 152.4,64.5 IC18.6
N$41
  Top 1.016: IC19.6 63.21,36.26 R52.2
N$46  (2 unrouted)
  Bottom 0.305: R25.1 101.56,71.65 101.54,71.65 | R19.1 88.86,71.7 88.93,71.7 | 114.3,71.65 114.3,71.1 | 126.98,71.65 R38.1 | 139.7,71.65 139.7,71.1 | 152.4,71.65 R50.1 | 63.5,71.7 R6.1
  Bottom 1.016: 139.7,71.1 R44.1 | R38.1 127,71.1 | 114.3,71.1 R32.1
  Bottom 1.676: R12.1 76.16,71.7 | 76.16,71.7 76.64,71.7 | 76.64,71.7 88.93,71.7 | 88.93,71.7 101.54,71.7 | 101.54,71.7 101.54,78.15 T7.A2 | T5.A2 88.9,71.7 88.93,71.7 | 76.16,71.7 76.16,78.15 T3.A2 | 101.54,71.7 101.54,71.65 114.44,71.65 | 114.44,71.65 126.98,71.65 | T9.A2 114.3,71.65 114.44,71.65 | T11.A2 127,71.65 126.98,71.65 | 139.7,71.65 T13.A2 | 126.98,71.65 139.7,71.65 | 139.7,71.65 152.4,71.65 | 152.4,71.65 T15.A2 | 152.4,71.65 152.45,71.65 | T1.A2 63.5,71.7 76.64,71.7
N$111
  Top 1.016: IC21.IN 23.03,78.02 C23.1 20.75,70.1 20.75,55.49 25.34,55.49 LED2.A
  Bottom 1.016: IC21.IN 23.31,79.78 CAMDEN_4P-1.P$2
N$112
  Top 1.016: R54.2 23.34,57.4 LED2.C
N$115
  Top 1.016: LED3.C 30.42,61.21 R55.2
N$116
  Top 1.016: D1.C 86.2,11.56 86.71,12.07 1.2
  Bottom 1.016: R56.2 84.31,12.07 1.2
N$117
  Bottom 1.016: B1.- R57.1
N$118
  Top 1.016: D1.A 96.36,3.35 90.17,9.54 88.75,9.54 1.3
  Bottom 1.016: R57.2 85.05,7.41 85.05,8.96 85.62,9.53 1.3
N$119
  Bottom 0.813: R4.1 63.5,60.7 IC1.1
N$120
  Top 1.016: R5.2 63.5,64.5 IC1.6
N$121
  Top 1.016: R5.1 C2.1
  Bottom 1.016: C2.1 59.7,69.2 R6.2
N$123
  Top 1.016: IC1.4 68.58,78.15 T1.G
N$125
  Bottom 0.813: R10.1 76.2,60.69 IC3.1
N$127
  Top 1.016: R11.1 72.39,69.06 C4.1
  Bottom 1.016: C4.1 72.43,69.2 R12.2
N$129
  Top 1.016: IC3.4 81.28,78.15 T3.G
N$131
  Bottom 0.813: R17.1 88.9,60.69 IC6.1
N$133
  Top 1.016: R18.1 85.09,69.06 C9.1
  Bottom 1.016: C9.1 85.14,69.2 R19.2
N$135
  Top 1.016: IC6.4 93.98,78.15 T5.G
N$137
  Bottom 0.813: R23.1 101.6,60.69 IC9.1
N$139
  Top 1.016: R24.1 97.82,69.06 C12.1
  Bottom 1.016: C12.1 97.78,69.2 R25.2
N$141
  Top 1.016: IC9.4 106.68,78.15 T7.G
N$143
  Bottom 0.813: R30.1 114.3,60.69 IC11.1
N$145
  Top 1.016: R31.1 110.77,69.06 C14.1
  Bottom 1.016: C14.1 110.73,69.2 R32.2
N$147
  Top 1.016: T9.G 119.38,78.15 IC11.4
N$149
  Bottom 0.813: R36.1 127,60.69 IC13.1
N$151
  Top 1.016: R37.1 123.47,69.06 C17.1
  Bottom 1.016: C17.1 123.5,69.2 R38.2
N$153
  Top 1.016: T11.G 132.08,78.15 IC13.4
N$155
  Bottom 0.813: R42.1 139.7,60.69 IC16.1
N$157
  Top 1.016: R43.1 136.17,69.06 C19.1
  Bottom 1.016: C19.1 136.14,69.2 R44.2
N$159
  Top 1.016: T13.G 144.78,78.15 IC16.4
N$161
  Bottom 0.813: R48.1 152.4,60.69 IC18.1
N$163
  Top 1.016: R49.1 C21.1
  Bottom 1.016: C21.1 148.6,69.2 R50.2
N$165
  Top 1.016: T15.G 157.48,78.15 IC18.4
N$168
  Bottom 1.016: R7.1 152.11,40.04 IC2.1
N$170
  Top 1.016: R8.1 C3.1
  Bottom 1.016: R9.2 151.84,31.6 C3.1
N$172
  Top 1.016: T2.G 147.03,22.58 IC2.4
N$174
  Bottom 1.016: R13.1 139.41,40.03 IC4.1
N$176
  Top 1.016: R14.1 142.95,31.6 C5.1
  Bottom 1.016: R15.2 139.14,31.6 C5.1
N$178
  Top 1.016: T4.G 134.33,22.58 IC4.4
N$180
  Bottom 1.016: R20.1 126.71,40.03 IC7.1
N$182
  Top 1.016: R21.1 C10.1
  Bottom 1.016: R22.2 126.44,31.6 C10.1
N$184
  Top 1.016: T6.G 121.63,22.58 IC7.4
N$186
  Bottom 1.016: R26.1 114.01,40.03 IC10.1
N$188
  Top 1.016: R27.1 C13.1
  Bottom 1.016: R28.2 113.74,31.6 C13.1
N$190
  Top 1.016: T8.G 108.93,22.58 IC10.4
N$192
  Bottom 1.016: R33.1 101.31,40.03 IC12.1
N$194
  Top 1.016: R34.1 C15.1
  Bottom 1.016: R35.2 101.04,31.6 C15.1
N$196
  Top 1.016: T10.G 96.23,22.58 IC12.4
N$198
  Bottom 1.016: R39.1 88.61,40.03 IC14.1
N$200
  Top 1.016: R40.1 C18.1
  Bottom 1.016: R41.2 88.34,31.6 C18.1
N$202
  Top 1.016: T12.G 83.53,22.58 IC14.4
N$204
  Bottom 1.016: R45.1 75.91,40.03 IC17.1
N$206
  Top 1.016: R46.1 C20.1
  Bottom 1.016: R47.2 75.64,31.6 C20.1
N$208
  Top 1.016: T14.G 70.83,22.58 IC17.4
N$210
  Bottom 1.016: R51.1 63.21,40.04 IC19.1
N$212
  Top 1.016: R52.1 C22.1
  Bottom 1.016: R53.2 63.21,31.6 C22.1
N$214
  Top 1.016: T16.G 58.13,22.58 IC19.4
N$217
  Bottom 1.016: R16.2 47.72,73.95 CAN_LINE_TERM.2
OUT1
  Top 0.305: IC18.2 154.94,45.3 51.59,45.3 51.59,44.6 49.03,42.04 47.03,42.04 IC8.32
OUT2
  Top 0.305: IC16.2 142.24,46.14 IC8.35
OUT3
  Top 0.305: IC13.2 129.54,46.94 IC8.36
OUT4
  Top 0.305: IC11.2 116.84,47.74 IC8.37
OUT5
  Top 0.305: IC9.2 104.14,51.74 IC8.42
OUT6
  Top 0.305: IC6.2 91.44,52.54 IC8.43
OUT7
  Top 0.305: IC3.2 78.74,53.34 IC8.44
OUT8
  Top 0.305: IC1.2 66.04,55.84 47.81,55.84 47.81,55.14 IC8.1
OUT9  (via drill 0.7)
  Top 0.305: v115.62,55.01 115.6,48.59 IC8.38
  Bottom 0.305: IC2.2 149.49,55 v115.62,55.01
OUT10  (via drill 0.7)
  Top 0.305: v113.78,53.24 113.78,49.34 IC8.39
  Bottom 0.305: IC4.2 136.88,53.24 114.69,53.24 114.6,53.24 v113.78,53.24
OUT11  (via drill 0.7)
  Top 0.305: v111.44,51.3 111.44,50.14 IC8.40
  Bottom 0.305: IC7.2 124.17,51.3 v111.44,51.3
OUT12  (via drill 0.7)
  Top 0.305: v108.65,52 108.65,52.49 106.34,52.49 106.34,50.94 IC8.41
  Bottom 0.305: IC10.2 111.47,46.2 108.72,46.2 108.72,52 v108.65,52
OUT13  (via drill 0.7)
  Top 0.305: v44.61,63.23 44.49,63.23 43.91,62.65 43.91,59.39 44.61,58.69 44.61,55.16 IC8.5
  Bottom 0.305: IC12.2 98.77,48.67 58.11,48.67 58.11,63.23 v44.61,63.23
OUT14  (via drill 0.7)
  Top 0.305: v45.42,61.14 IC8.4
  Bottom 0.305: IC14.2 86.07,47.51 57.14,47.51 57.14,61.14 v45.42,61.14
OUT15  (via drill 0.7)
  Top 0.305: IC8.3 46.23,58.85 v46.78,59.39
  Bottom 0.305: IC17.2 73.37,46.46 56.27,46.55 56.27,59.47 v46.78,59.39
OUT16  (via drill 0.7)
  Top 0.305: v48.74,57.88 47.03,57.88 IC8.2
  Bottom 0.305: IC19.2 60.67,45.41 55.29,45.41 55.29,57.88 v48.74,57.88
OUTPUT1  (1 unrouted)
  Bottom 1.016: T16.A1 67.06,22.58 C22.2
OUTPUT2  (1 unrouted)
  Bottom 1.016: T14.A1 79.45,22.58 C20.2
OUTPUT3  (1 unrouted)
  Bottom 1.016: T12.A1 92.16,22.58 C18.2
OUTPUT4  (1 unrouted)
  Bottom 1.016: T10.A1 104.85,22.58 C15.2
OUTPUT5  (1 unrouted)
  Bottom 1.016: T8.A1 117.55,22.58 C13.2
OUTPUT6  (1 unrouted)
  Bottom 1.016: T6.A1 130.25,22.58 C10.2
OUTPUT7  (1 unrouted)
  Bottom 1.016: T4.A1 142.93,22.58 C5.2
OUTPUT8  (1 unrouted)
  Bottom 1.016: T2.A1 155.69,22.58 C3.2
OUTPUT9  (1 unrouted)
  Bottom 1.016: T1.A1 60.96,74.14 C2.2
OUTPUT10  (1 unrouted)
  Bottom 1.016: T3.A1 73.66,74.14 C4.2
OUTPUT11  (1 unrouted)
  Bottom 1.016: T5.A1 86.36,74.14 C9.2
OUTPUT12  (1 unrouted)
  Bottom 1.016: T7.A1 99.06,74.14 C12.2
OUTPUT13  (1 unrouted)
  Bottom 1.016: C14.2 111.76,74.14 T9.A1
OUTPUT14  (1 unrouted)
  Bottom 1.016: C17.2 124.46,74.14 T11.A1
OUTPUT15  (1 unrouted)
  Bottom 1.016: C19.2 137.16,74.14 T13.A1
OUTPUT16  (1 unrouted)
  Bottom 1.016: C21.2 149.86,74.14 T15.A1
PGC
  Top 0.305: X2.3 31.42,36.86 31.42,50.15 38.03,50.15 IC8.16
PGD
  Top 0.305: X2.2 32.15,34.32 32.15,49.34 IC8.17
RS232_RX
  Top 0.305: IC8.14 35.29,51.74 33.89,53.14 27.3,53.14 X1.4
RS232_TX
  Top 0.305: IC8.15 27.64,50.94 X1.3